# EAGLE board Schematic v37 (EAGLE 9.7.0)
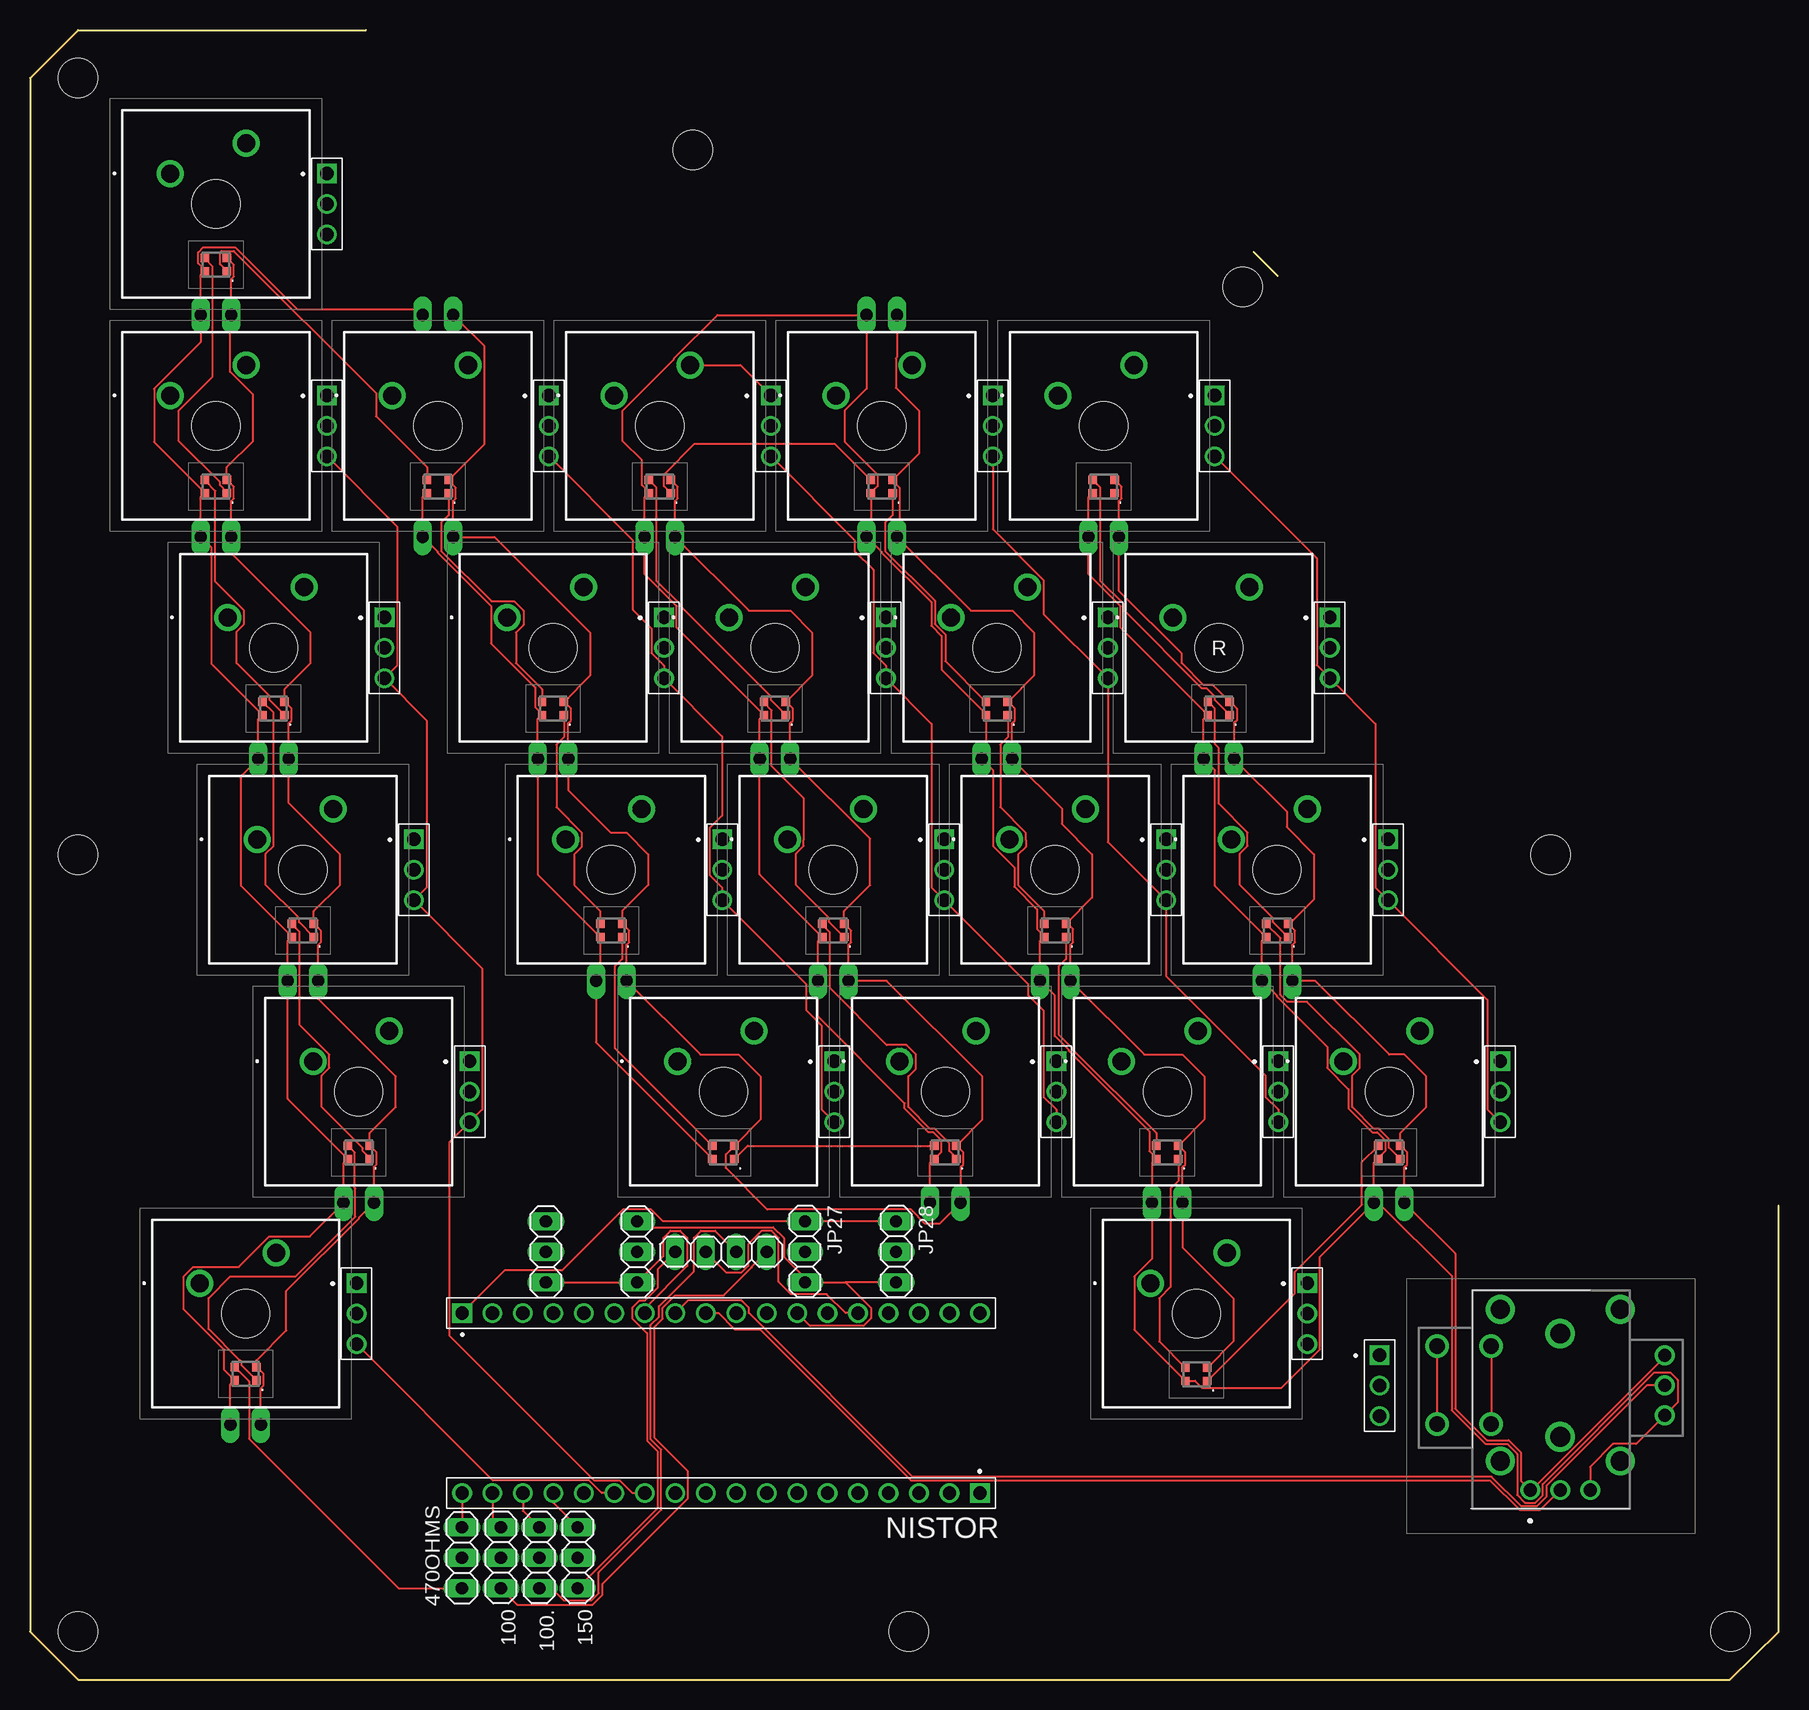
[diagram p0: board, top side]
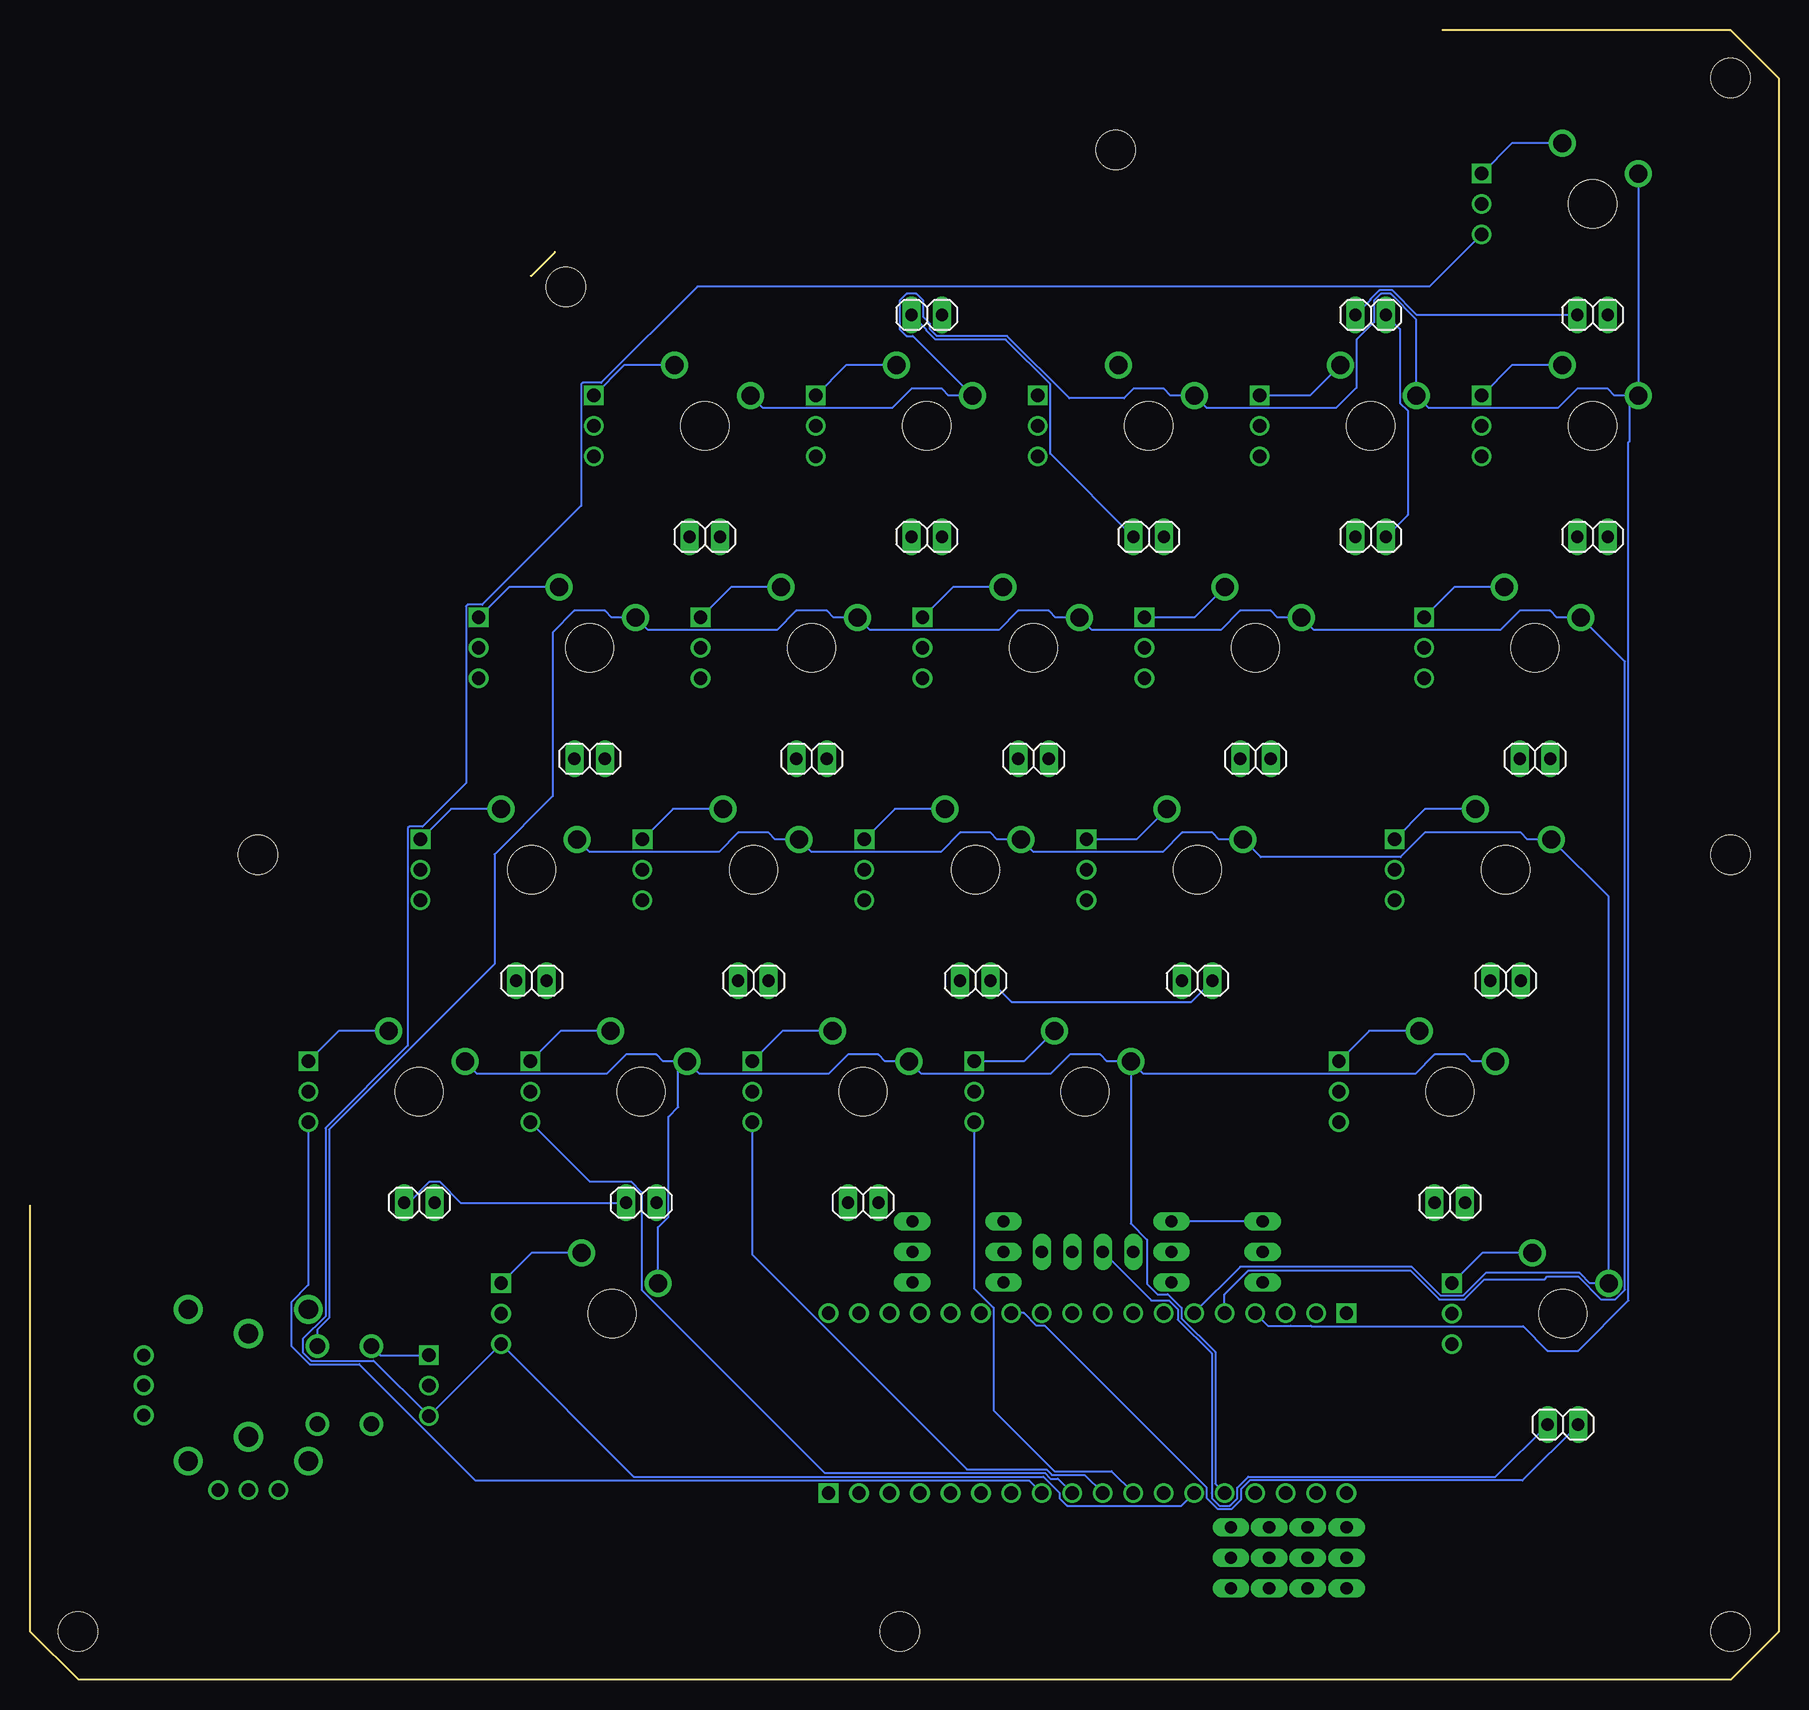
[diagram p1: board, bottom side, seen from below]

Size 145.75 x 137.5 mm. Coordinates in mm from the lower left corner, seen from the top.
Outline: 28,137.5 4,137.5 0,133.5 0,4 4,0 141.7,0 145.75,4 145.75,39.5
Outline: 104,117 102,119
Copper layers (1*16): Top / Bottom
Stack-up Default Layer Stack: Top User Defined 0.035mm / Dielectric-1 User Defined 1.5mm / Bottom User Defined 0.035mm
Design rules "default": minimum track width 6mil, minimum drill 0.35mm, track to track 6mil, track to pad 6mil, pad to pad 6mil, via to via 6mil, smd to smd 6mil, copper to edge 40mil, drill to drill 6mil, minimum pad ring 10mil, minimum via ring 8mil, stop-mask expansion 4mil, vias tented up to drill 0mil, thermal gap 10mil
Holes 3.25 mm at 4,133.5 4,4 141.75,4 101.08,116.08 73.25,4 4,68.75 126.75,68.75 55.25,127.5

## Footprints (pad centres in the part's own frame; a part is rotated, then mirrored left to right if it is on the bottom)
MX1AE1NW = drill 1.499 pad 2.248: 1 0,0; 2 6.35,2.54 | hole 3.988: 3.81,-2.54
1X03 = drill 1.016 long: 1 -2.54,0; 2 0,0; 3 2.54,0
RKJXV122400R = drill 1.3 pad 1.95: A1 -11.98,-3.25; B1 -11.98,-7.75; C1 -5.48,-3.25; D1 -5.48,-7.75 | drill 1.1 pad 1.65: A11 0,0; A12 0,2.5; A13 0,5; B11 -6.23,11.23; B12 -8.73,11.23; B13 -11.23,11.23 | drill 1.6 pad 2.4: MH1 -15.055,-2.5; MH2 -15.055,7.5; MH3 -2.405,-2.5; MH4 -2.405,7.5 | drill 1.65 pad 2.475: MH5 -13.03,2.5; MH6 -4.43,2.5
61300311121 = drill 1.1 square: 1 -2.54,0 | drill 1.1: 2 0,0; 3 2.54,0
61301811121 = drill 1.1 square: 1 -21.59,0 | drill 1.1: 2 -19.05,0; 3 -16.51,0; 4 -13.97,0; 5 -11.43,0; 6 -8.89,0; 7 -6.35,0; 8 -3.81,0; 9 -1.27,0; 10 1.27,0; 11 3.81,0; 12 6.35,0; 13 8.89,0; 14 11.43,0; 15 13.97,0; 16 16.51,0; 17 19.05,0; 18 21.59,0
1X04 = drill 1.016 long: 1 -3.81,0; 2 -1.27,0; 3 1.27,0; 4 3.81,0
1X02 = drill 1.016 long: 1 -1.27,0; 2 1.27,0
WS2812B2020 = smd 0.7 x 0.7: 1 0.915,-0.55; 2 0.915,0.55; 3 -0.915,0.55; 4 -0.915,-0.55

## Placement (x,y rotation side)
1  MX1A-E1NW  [MX1AE1NW]  30.19,107.04 0 top
2  MX1A-E1NW  [MX1AE1NW]  48.69,107.04 0 top
3  MX1A-E1NW  [MX1AE1NW]  67.19,107.04 0 top
4  MX1A-E1NW  [MX1AE1NW]  85.69,107.04 0 top
100  PINHD-1X3  [1X03]  39.25,10.15 270 top
100.  PINHD-1X3  [1X03]  42.45,10.15 270 top
150  PINHD-1X3  [1X03]  45.65,10.15 270 top
470OHMS  PINHD-1X3  [1X03]  36,10.15 90 top
A  MX1A-E1NW  [MX1AE1NW]  44.64,70.04 0 top
A_STICK  RKJXV122400R  [RKJXV122400R]  125.05,15.8 270 top
C  MX1A-E1NW  [MX1AE1NW]  90.99,51.54 0 top
CAPS  MX1A-E1NW  [MX1AE1NW]  18.94,70.04 0 top
CTRL  MX1A-E1NW  [MX1AE1NW]  14.16,33.04 0 top
D  MX1A-E1NW  [MX1AE1NW]  81.64,70.04 0 top
E  MX1A-E1NW  [MX1AE1NW]  76.79,88.54 0 top
ESC  MX1A-E1NW  [MX1AE1NW]  11.69,125.54 0 top
F  MX1A-E1NW  [MX1AE1NW]  100.14,70.04 0 top
J1  61300311121  [61300311121]  24.75,104.5 270 top
J2  61300311121  [61300311121]  24.75,123 270 top
J3  61300311121  [61300311121]  29.55,86 270 top
J4  61300311121  [61300311121]  32,67.5 270 top
J5  61300311121  [61300311121]  36.65,49 270 top
J6  61300311121  [61300311121]  27.23,30.5 270 top
J7  61300311121  [61300311121]  43.25,104.5 270 top
J8  61300311121  [61300311121]  52.85,86 270 top
J9  61300311121  [61300311121]  57.7,67.5 270 top
J10  61300311121  [61300311121]  67.05,49 270 top
J11  61300311121  [61300311121]  85.55,49 270 top
J12  61300311121  [61300311121]  76.2,67.5 270 top
J13  61300311121  [61300311121]  71.35,86 270 top
J14  61300311121  [61300311121]  61.75,104.5 270 top
J15  61300311121  [61300311121]  80.25,104.5 270 top
J16  61300311121  [61300311121]  89.85,86 270 top
J17  61300311121  [61300311121]  94.7,67.5 270 top
J18  61300311121  [61300311121]  104.05,49 270 top
J19  61300311121  [61300311121]  98.75,104.5 270 top
J20  61300311121  [61300311121]  108.35,86 270 top
J21  61300311121  [61300311121]  113.2,67.5 270 top
J22  61300311121  [61300311121]  122.55,49 270 top
J23  61300311121  [61300311121]  106.47,30.5 270 top
J24  61301811121  [61301811121]  57.6,30.55 0 top
J26  61300311121  [61300311121]  112.5,24.5 270 top
JP1  PINHD-1X3  [1X03]  50.6,35.65 90 top
JP2  PINHD-1X3  [1X03]  43,35.65 90 top
JP3  PINHD-1X4  [1X04]  57.6,35.65 0 top
JP4  PINHD-1X2  [1X02]  17.98,21.25 0 bottom
JP5  PINHD-1X2  [1X02]  27.4,39.75 0 bottom
JP6  PINHD-1X2  [1X02]  22.75,58.25 0 bottom
JP7  PINHD-1X2  [1X02]  20.3,76.75 0 bottom
JP8  PINHD-1X2  [1X02]  15.5,95.25 0 bottom
JP9  PINHD-1X2  [1X02]  15.5,113.75 0 bottom
JP10  PINHD-1X2  [1X02]  34,113.75 0 bottom
JP11  PINHD-1X2  [1X02]  34,95.25 0 bottom
JP12  PINHD-1X2  [1X02]  43.6,76.75 0 bottom
JP13  PINHD-1X2  [1X02]  48.45,58.25 0 bottom
JP14  PINHD-1X2  [1X02]  76.3,39.75 0 bottom
JP15  PINHD-1X2  [1X02]  66.95,58.25 0 bottom
JP16  PINHD-1X2  [1X02]  62.1,76.75 0 bottom
JP17  PINHD-1X2  [1X02]  52.5,95.25 0 bottom
JP18  PINHD-1X2  [1X02]  71,113.75 0 bottom
JP19  PINHD-1X2  [1X02]  71,95.25 0 bottom
JP20  PINHD-1X2  [1X02]  80.6,76.75 0 bottom
JP21  PINHD-1X2  [1X02]  85.45,58.25 0 bottom
JP22  PINHD-1X2  [1X02]  94.8,39.75 0 bottom
JP23  PINHD-1X2  [1X02]  113.3,39.75 0 bottom
JP24  PINHD-1X2  [1X02]  103.95,58.25 0 bottom
JP25  PINHD-1X2  [1X02]  99.1,76.75 0 bottom
JP26  PINHD-1X2  [1X02]  89.5,95.25 0 bottom
JP27  PINHD-1X3  [1X03]  64.6,35.65 270 top
JP28  PINHD-1X3  [1X03]  72.2,35.65 270 top
LED1  WS2812B-2020  [WS2812B2020]  17.98,25.49 0 top
LED2  WS2812B-2020  [WS2812B2020]  27.4,43.95 0 top
LED3  WS2812B-2020  [WS2812B2020]  22.75,62.45 0 top
LED4  WS2812B-2020  [WS2812B2020]  20.3,80.95 0 top
LED5  WS2812B-2020  [WS2812B2020]  15.5,99.45 0 top
LED6  WS2812B-2020  [WS2812B2020]  15.5,117.95 0 top
LED7  WS2812B-2020  [WS2812B2020]  34,99.45 0 top
LED8  WS2812B-2020  [WS2812B2020]  43.6,80.95 0 top
LED9  WS2812B-2020  [WS2812B2020]  48.45,62.45 0 top
LED10  WS2812B-2020  [WS2812B2020]  57.8,43.95 0 top
LED11  WS2812B-2020  [WS2812B2020]  76.3,43.95 0 top
LED12  WS2812B-2020  [WS2812B2020]  66.95,62.45 0 top
LED13  WS2812B-2020  [WS2812B2020]  62.1,80.95 0 top
LED14  WS2812B-2020  [WS2812B2020]  52.5,99.45 0 top
LED15  WS2812B-2020  [WS2812B2020]  71,99.45 0 top
LED16  WS2812B-2020  [WS2812B2020]  80.6,80.95 0 top
LED17  WS2812B-2020  [WS2812B2020]  85.45,62.45 0 top
LED18  WS2812B-2020  [WS2812B2020]  94.8,43.95 0 top
LED19  WS2812B-2020  [WS2812B2020]  97.22,25.45 0 top
LED20  WS2812B-2020  [WS2812B2020]  113.3,43.95 0 top
LED21  WS2812B-2020  [WS2812B2020]  103.95,62.45 0 top
LED22  WS2812B-2020  [WS2812B2020]  99.1,80.95 0 top
LED23  WS2812B-2020  [WS2812B2020]  89.5,99.45 0 top
NISTOR  61301811121  [61301811121]  57.6,15.55 180 top
Q  MX1A-E1NW  [MX1AE1NW]  39.79,88.54 0 top
R  MX1A-E1NW  [MX1AE1NW]  95.29,88.54 0 top
S  MX1A-E1NW  [MX1AE1NW]  63.14,70.04 0 top
SHIFT  MX1A-E1NW  [MX1AE1NW]  23.59,51.54 0 top
SPACE  MX1A-E1NW  [MX1AE1NW]  93.42,33.04 0 top
TAB  MX1A-E1NW  [MX1AE1NW]  16.49,88.54 0 top
V  MX1A-E1NW  [MX1AE1NW]  109.49,51.54 0 top
W  MX1A-E1NW  [MX1AE1NW]  58.29,88.54 0 top
X  MX1A-E1NW  [MX1AE1NW]  72.49,51.54 0 top
Z  MX1A-E1NW  [MX1AE1NW]  53.99,51.54 0 top
~  MX1A-E1NW  [MX1AE1NW]  11.69,107.04 0 top

## Library data of the parts
1-4 A C CAPS CTRL D E ESC F Q R S SHIFT SPACE TAB V W X Z ~ = SamacSys_Parts; DESCRIPTION: Pushbutton Switches Full Travel, Mech. Keyswitch, Click Tactile Feel (Blue stem), 60cN, No LED, No Diode, Fixation Pins for PCB Mounting; HEIGHT: 15.2mm; MANUFACTURER_NAME: Cherry; MANUFACTURER_PART_NUMBER: MX1A-E1NW; MOUSER_PART_NUMBER: 540-MX1A-E1NW; MOUSER_PRICE-STOCK: https://www.mouser.co.uk/ProductDetail/CHERRY/MX1A-E1NW/?qs=Z7NFYKyvgJd45Wm4xzFv7w%3D%3D
100 100. 150 470OHMS JP1-JP28 = Connector; CATEGORY: CONNECTOR; SUB-CATEGORY: PIN-HEADER
A_STICK = SamacSys_Parts; DESCRIPTION: RKJXV122400R; HEIGHT: 18.95mm; MANUFACTURER_NAME: ALPS; MANUFACTURER_PART_NUMBER: RKJXV122400R; MOUSER_PART_NUMBER: 688-RKJXV122400R; MOUSER_PRICE-STOCK: https://www.mouser.co.uk/ProductDetail/ALPS/RKJXV122400R?qs=GedFDFLaBXEbB%252ByoOVwLBg%3D%3D
J1-J23 J26 = Headers; CREATED_BY: PCBLayout.com; DIGI_KEY_PART_NUMBER: 732-5316-ND; MANUFACTURER: Wurth Electronics Inc.; MPN: 61300311121
J24 NISTOR = Headers; CREATED_BY: PCBLayout.com; DIGIKEY_PART_NUMBER: 732-5328-ND; MANUFACTURER: Wurth Electronics Inc.; MPN: 61301811121
LED1-LED23 = WS2812B-2020; DESCRIPTION: LED; SMD; 2020; RGB; 2x2x0.84mm; 3.75.3V; Lens: transparent; 2kHz; HEIGHT: 0.84mm; MANUFACTURER_NAME: Worldsemi; MANUFACTURER_PART_NUMBER: WS2812B-2020

## Nets
N$1: J1.1 ~.2
N$2: ESC.2 J2.1
N$3: J3.1 TAB.2
N$4: CAPS.2 J4.1
N$5: J5.1 SHIFT.2
N$6: CTRL.2 J6.1
N$7: J11.1 X.2
N$8: J12.1 S.2
N$9: J13.1 W.2
N$10: 2.2 J14.1
N$11: 3.2 J15.1
N$12: E.2 J16.1
N$13: D.2 J17.1
N$14: C.2 J18.1
N$15: 4.2 J19.1
N$16: J20.1 R.2
N$17: F.2 J21.1
N$18: J22.1 V.2
N$19: J23.1 SPACE.2
N$20: A_STICK.A11 A_STICK.B13 J24.14 JP3.2 JP4.1 JP5.1 JP6.1 JP7.1 JP8.1 JP9.1 JP10.1 JP11.1 JP12.1 JP13.1 JP14.1 JP15.1 JP16.1 JP17.1 JP18.1 JP19.1 JP20.1 JP21.1 JP22.1 JP23.1 JP24.1 JP25.1 JP26.1 LED1.2 LED2.2 LED3.2 LED4.2 LED5.2 LED6.2 LED7.2 LED8.2 LED9.2 LED10.2 LED11.2 LED12.2 LED13.2 LED14.2 LED15.2 LED16.2 LED17.2 LED18.2 LED19.2 LED20.2 LED21.2 LED22.2 LED23.2
N$21: A.1 CAPS.1 CTRL.1 D.1 F.1 J24.6 S.1
N$22: A_STICK.A1 A_STICK.C1 E.1 J24.5 Q.1 R.1 TAB.1 W.1
N$23: 1.1 2.1 3.1 4.1 ESC.1 J24.4 ~.1
N$24: J1.3 J3.3 J4.3 J5.3 NISTOR.12
N$25: 1.2 J7.1
N$26: J8.1 Q.2
N$27: A.2 J9.1
N$28: J10.1 Z.2
N$29: J7.3 J8.3 J9.3 J10.3 NISTOR.11
N$30: J11.3 J12.3 J13.3 J14.3 NISTOR.10
N$31: J15.3 J16.3 J17.3 J18.3 NISTOR.9
N$32: J19.3 J20.3 J21.3 J22.3 NISTOR.8
N$33: J2.3 J6.3 J23.3 J26.3 NISTOR.13
N$34: 100.1 NISTOR.17
N$35: 100..1 NISTOR.16
N$36: 150.1 NISTOR.15
N$37: J24.1 JP27.1 JP28.1
N$38: 150.3 JP3.1
N$39: J24.7 JP1.1 JP2.1
N$41: A_STICK.A13 A_STICK.B11 J24.12 JP1.3 JP2.3 JP4.2 JP5.2 JP6.2 JP7.2 JP8.2 JP9.2 JP10.2 JP11.2 JP12.2 JP13.2 JP14.2 JP15.2 JP16.2 JP17.2 JP18.2 JP19.2 JP20.2 JP21.2 JP22.2 JP23.2 JP24.2 JP25.2 JP26.2 JP27.3 JP28.3 LED1.4 LED2.4 LED3.4 LED4.4 LED5.4 LED6.4 LED7.4 LED8.4 LED9.4 LED10.4 LED11.4 LED12.4 LED13.4 LED14.4 LED15.4 LED16.4 LED17.4 LED18.4 LED19.4 LED20.4 LED21.4 LED22.4 LED23.4
N$42: A_STICK.B12 J24.8
N$43: A_STICK.A12 J24.9
N$44: C.1 NISTOR.14 SHIFT.1 SPACE.1 V.1 X.1 Z.1
N$45: A_STICK.B1 A_STICK.D1 J26.1
N$46: 100..3 JP3.3
N$47: LED1.1 LED2.3
N$48: LED2.1 LED3.3
N$49: LED3.1 LED4.3
N$50: LED4.1 LED5.3
N$51: LED5.1 LED6.3
N$52: LED6.1 LED7.3
N$53: LED7.1 LED8.3
N$54: LED8.1 LED9.3
N$55: LED9.1 LED10.3
N$56: LED10.1 LED11.3
N$57: LED11.1 LED12.3
N$58: LED12.1 LED13.3
N$59: LED13.1 LED14.3
N$60: LED14.1 LED15.3
N$61: LED15.1 LED16.3
N$62: LED16.1 LED17.3
N$63: LED17.1 LED18.3
N$64: LED18.1 LED19.3
N$65: LED19.1 LED20.3
N$66: LED20.1 LED21.3
N$67: LED21.1 LED22.3
N$68: LED22.1 LED23.3
N$69: 470OHMS.3 NISTOR.18
N$70: 100.3 JP3.4
N$71: 470OHMS.1 LED1.3

## Tracks (layer width: path | path; a pad name or v marks a point on that pad's centre or on a via)
N$1
  Bottom 0.152: ~.2 22.21,109.58 J1.1
N$2
  Bottom 0.152: ESC.2 22.21,128.08 J2.1
N$3
  Bottom 0.152: TAB.2 27.01,91.08 J3.1
N$4
  Bottom 0.152: CAPS.2 29.46,72.58 J4.1
N$5
  Bottom 0.152: SHIFT.2 34.11,54.08 J5.1
N$6
  Bottom 0.152: CTRL.2 24.68,35.58 J6.1
N$7
  Bottom 0.152: X.2 83.01,54.08 J11.1
N$8
  Bottom 0.152: S.2 73.66,72.58 J12.1
N$9
  Bottom 0.152: W.2 68.81,91.08 J13.1
N$10
  Top 0.152: 2.2 59.21,109.58 J14.1
N$11
  Bottom 0.152: 3.2 77.71,109.58 J15.1
N$12
  Bottom 0.152: E.2 87.31,91.08 J16.1
N$13
  Bottom 0.152: D.2 92.16,72.58 J17.1
N$14
  Bottom 0.152: C.2 101.51,54.08 J18.1
N$15
  Bottom 0.152: 4.2 96.21,109.58 J19.1
N$16
  Bottom 0.152: R.2 105.81,91.08 J20.1
N$17
  Bottom 0.152: F.2 110.66,72.58 J21.1
N$18
  Bottom 0.152: V.2 120.01,54.08 J22.1
N$19
  Bottom 0.152: SPACE.2 103.94,35.58 J23.1
N$20
  Top 0.152: A_STICK.B13 136.28,26.89 125.16,15.76 125.09,15.76 A_STICK.A11 124.28,16.57 124.28,18.92 123.27,19.94 121.44,19.94 118.81,22.57 118.81,35.51 JP23.1 114.57,42.73 114.79,42.95 114.79,43.92 LED20.2 114.22,45.55 116.39,47.72 116.39,50.28 114.58,52.09 113.3,52.09 107.14,58.25 JP24.1 105.22,61.23 105.44,61.45 105.44,62.42 104.93,62.93 | JP4.1 19.25,24.28 19.47,24.5 19.47,25.47 LED1.2 18.89,26.62 21.37,29.09 21.37,32.39 27.43,38.45 27.43,38.51 JP5.1 28.67,42.73 28.89,42.95 28.89,43.92 LED2.2 28.32,45.55 30.49,47.72 30.49,50.28 24.02,56.74 JP6.1 24.02,61.22 24.26,61.47 24.26,62.4 LED3.2 23.66,64.05 25.84,66.22 25.84,68.78 21.57,73.04 JP7.1 21.57,79.73 21.79,79.95 21.79,80.92 LED4.2 21.21,82.55 23.39,84.72 23.39,87.28 16.77,93.89 JP8.1 16.77,98.23 16.99,98.45 16.99,99.42 LED5.2 16.41,101.05 18.59,103.22 18.59,107.12 16.69,109.02 16.69,113.67 JP9.1 16.77,116.73 16.99,116.95 16.99,117.92 LED6.2 | JP10.1 37.89,111.13 37.89,102.98 LED7.2 34.91,99.92 35.49,99.34 35.49,98.45 35.27,98.23 JP11.1 38.71,95.25 46.69,87.28 46.69,83.67 LED8.2 45.09,80.92 45.09,79.95 44.87,79.73 JP12.1 44.87,74.13 48.41,70.59 49.73,70.59 51.54,68.78 51.54,66.22 49.37,64.05 LED9.2 49.94,62.42 49.94,61.45 49.72,61.23 JP13.1 55.88,52.09 59.08,52.09 60.89,50.28 60.89,46.67 LED10.2 58,43.78 58,42.63 61.45,39.18 73.44,39.18 74.62,38 75.82,38 JP14.1 77.57,42.73 77.79,42.95 77.79,43.92 LED11.2 79.39,46.67 79.39,50.28 71.41,58.25 JP15.1 68.22,61.23 68.44,61.45 68.44,62.42 LED12.2 67.86,64.05 70.04,66.22 70.04,70.08 JP16.1 63.37,79.73 63.59,79.95 63.59,80.92 LED13.2 65.19,83.67 65.19,87.28 63.38,89.09 59.93,89.09 JP17.1 53.77,98.23 53.99,98.45 53.99,99.42 LED14.2
  Top 0.152: JP18.1 72.27,110.22 72.19,110.14 72.19,107.68 74.09,105.78 74.09,102.17 LED15.2 71.92,99.92 72.49,99.34 72.49,95.47 JP19.1 78.43,89.09 81.88,89.09 83.69,87.28 83.69,83.67 LED16.2 82.09,80.92 82.09,79.95 81.87,79.73 JP20.1 86,72.62 86,71.31 88.54,68.78 88.54,65.17 86.43,63.07 | 86.43,63.07 LED17.2 | 86.43,63.07 86.94,62.56 86.94,61.45 86.72,61.23 JP21.1 92.88,52.09 96.08,52.09 97.89,50.28 97.89,46.67 LED18.2 96.29,43.92 96.29,42.95 96.07,42.73 JP22.1 96.07,36.02 100.31,31.78 100.31,28.17 LED19.2 | 104.93,62.93 LED21.2 | 104.93,62.93 107.04,65.04 107.04,68.78 104.75,71.06 104.75,72.37 JP25.1 100.37,79.73 100.59,79.95 100.59,80.92 LED22.2 98.6,82.91 97.82,82.91 96.01,84.72 96.01,85.5 90.77,90.75 JP26.1 90.77,98.23 90.99,98.45 90.99,99.42 LED23.2 | J24.14 67.98,30.55 66.41,32.12 63.43,32.12 62.4,33.15 62.4,36.82 61.82,37.4 61,37.4 59.86,36.26 59.86,34.48 59.28,33.9 58.08,33.9 JP3.2
  Bottom 0.152: JP17.1 60.7,102.18 60.7,107.96 64.43,111.69 70.27,111.69 71.03,112.45 71.03,112.5 JP18.1 | JP23.1 114.19,39.75 112.44,41.5 111.62,41.5 109.87,39.75 JP22.1 | JP9.1 30.14,113.75 32.19,115.81 33.27,115.81 34.02,115.05 34.02,115 JP10.1 | JP4.1 23.59,16.91 44.19,16.91 45.12,15.98 45.12,15.11 45.73,14.5 46.61,14.5 47.22,15.11 47.22,15.52 47.25,15.55 47.25,27.17 50.07,29.99 50.07,30.86 50.81,31.6 52.28,31.6 JP3.2
N$21
  Bottom 0.152: F.1 99.09,68.99 88.33,68.99 86.73,70.59 84.17,70.59 83.63,70.04 D.1 80.59,68.99 69.83,68.99 68.23,70.59 65.67,70.59 65.13,70.04 S.1 62.09,68.99 51.33,68.99 49.73,70.59 47.17,70.59 46.63,70.04 A.1 43.15,68.55 31.51,68.55 29.48,70.59 21.47,70.59 20.93,70.04 CAPS.1 14.16,65.27 CTRL.1 15.72,33.04 16.57,33.89 24.4,33.89 26.3,31.99 28.14,31.99 30.56,34.41 44.85,34.41 J24.6
N$22
  Top 0.152: A_STICK.A1 A_STICK.C1
  Bottom 0.152: A_STICK.A1 121.8,29.15 120.82,30.14 120.82,45.85 107.04,59.63 107.04,68.78 102.19,73.63 102.19,87.28 100.38,89.09 97.82,89.09 97.28,88.54 R.1 94.23,87.48 83.48,87.48 81.88,89.09 79.32,89.09 78.78,88.54 E.1 75.74,87.49 64.98,87.49 63.38,89.09 60.82,89.09 60.28,88.54 W.1 57.24,87.49 46.48,87.49 44.88,89.09 42.32,89.09 41.78,88.54 Q.1 38.74,87.49 23.18,87.49 21.58,89.09 19.02,89.09 18.48,88.54 TAB.1 12.81,84.86 12.81,32.48 13.61,31.69 14.8,31.69 16.7,33.59 19.25,33.59 19.49,33.35 24.51,33.35 26.18,31.68 28.27,31.68 30.69,34.1 44.17,34.1 46.17,32.1 J24.5
N$23
  Bottom 0.152: ESC.1 ~.1 | ~.1 13.68,107.04 14.22,107.59 16.78,107.59 18.38,105.99 29.14,105.99 1.1 30.19,113.37 32.32,115.5 33.14,115.5 33.72,114.92 33.72,113.14 35.19,111.67 35.19,107.68 36.88,105.99 47.64,105.99 2.1 50.68,107.04 51.22,107.59 53.78,107.59 54.56,106.81 59.11,106.81 64.3,112 70.14,112 70.72,112.58 70.72,113.01 71.28,113.57 71.28,114.92 71.86,115.5 72.68,115.5 73.26,114.92 73.26,112.58 72.68,112 72.15,112 3.1 69.18,107.04 69.72,107.59 72.28,107.59 73.88,105.99 84.64,105.99 4.1 | J24.4 42.58,29.5 40.65,29.5 38.99,29.5 38.94,29.45 21.29,29.45 19.25,27.41 16.7,27.41 12.51,31.6 12.51,103.13 12.41,103.22 12.41,106.32 ~.1
N$24
  Top 0.152: J1.3 30.6,96.11 30.6,84.51 J3.3 33.05,79.96 33.05,66.01 J4.3 37.7,59.26 37.7,47.51 J5.3 34.96,44.77 34.96,28.69 47.04,16.6 49.15,16.6 50.2,15.55 NISTOR.12
N$25
  Bottom 0.152: 1.2 39.08,107.04 J7.1
N$26
  Bottom 0.152: Q.2 48.68,88.54 J8.1
N$27
  Bottom 0.152: A.2 53.53,70.04 J9.1
N$28
  Bottom 0.152: Z.2 62.88,51.54 J10.1
N$29
  Top 0.152: J7.3 50.24,94.97 50.24,89.18 51.8,87.62 51.8,85.56 52.85,84.51 J8.3 57.7,78.61 57.7,72.01 56.65,70.96 56.65,67.06 57.7,66.01 J9.3 64.69,57.97 64.69,55.81 66,54.51 66,47.51 J10.3
  Bottom 0.152: NISTOR.11 55.6,17.36 60.36,17.36 65.44,22.43 65.44,30.99 67.05,32.6 J10.3
N$30
  Top 0.152: J14.3 68.74,94.97 68.74,94.08 70.3,92.52 70.3,85.56 71.35,84.51 J13.3 75.15,79.66 75.15,66.01 J12.3 83.19,57.97 83.19,57.08 84.5,55.77 84.5,48.56 85.55,47.51 J11.3
  Bottom 0.152: J11.3 85.55,35.42 67.65,17.52 61.03,17.52 60.56,17.05 57.84,17.05 NISTOR.10
N$31
  Top 0.152: J15.3 80.25,95.88 84.49,91.64 84.49,88.82 J16.3 89.85,69.81 J17.3 94.7,58.63 103,50.34 103,48.56 104.05,47.51 J18.3
  Bottom 0.152: J18.3 99.09,41.5 95.66,41.5 94.77,40.61 94.77,32.48 79.5,17.21 61.15,17.21 60.69,16.75 60.07,16.75 NISTOR.9
N$32
  Top 0.152: J19.3 107.25,93.46 107.25,84.56 J20.3 112.15,79.66 112.15,66.01 J21.3 121.5,56.66 121.5,47.51 J22.3
  Bottom 0.152: NISTOR.8 62.46,16.6 108.63,16.6 118.3,26.27 122.42,26.27 123.98,27.82 123.98,31.45 122.55,32.88 J22.3
N$33
  Top 0.152: J6.3 38.58,16.6 46.61,16.6 47.66,15.55 NISTOR.13
  Bottom 0.152: NISTOR.13 49.76,14.5 59.31,14.5 59.92,15.11 59.92,15.55 61.28,16.91 95.42,16.91 J23.3 112.47,21.96 J26.3 117.12,26.58 122.3,26.58 123,27.28 123,28.38 121.12,30.26 121.12,45.97 114.25,52.84 114.25,70.96 114.12,71.09 113.03,71.09 109.4,74.72 109.4,89.46 109.27,89.59 108.05,89.59 99.8,97.84 99.8,107.96 99.67,108.09 98.13,108.09 90.11,116.11 29.1,116.11 J2.3
N$34
  Top 0.152: NISTOR.17 38.55,13.39 100.1
N$35
  Top 0.152: NISTOR.16 41.09,14.05 100..1
N$36
  Top 0.152: NISTOR.15 43.63,14.71 150.1
N$37
  Top 0.152: JP28.1 JP27.1 52.76,38.19 51.77,39.18 49.43,39.18 44.35,34.1 39.56,34.1 J24.1
N$38
  Top 0.152: 150.3 52.3,14.26 52.3,19.03 51.44,19.9 51.44,28.87 50.2,30.11 50.2,30.99 50.81,31.6 51.26,31.6 52.35,32.7 52.35,34.21 JP3.1
N$39
  Top 0.152: JP2.1 JP1.1 52.8,35.31 52.8,36.82 53.38,37.4 54.2,37.4 54.78,36.82 54.78,34.48 51.25,30.95 J24.7
N$41
  Top 0.152: JP4.2 16.7,24.59 LED1.4 16.2,25.81 16.2,27.48 12.81,30.87 12.81,33.6 13.61,34.39 17.41,34.39 19.95,36.93 23.31,36.93 JP5.2 26.13,43.05 LED2.4 21.48,48.41 JP6.2 21.48,61.55 LED3.4 17.59,66.15 17.59,75.31 JP7.2 19.03,80.05 LED4.4 15.14,84.65 15.14,94.34 JP8.2 14.23,98.55 LED5.4 10.34,103.15 10.34,107.6 14.23,111.49 JP9.2 14.23,117.05 LED6.4 14.59,117.48 14.01,118.06 14.01,118.94 14.45,119.38 17.12,119.38 22.25,114.25 32.23,114.25 JP10.2 | LED7.4 32.73,98.55 JP11.2 33.98,94 33.98,93.95 38.44,89.49 38.44,86.37 42.11,82.7 42.11,81.06 42.69,80.48 LED8.4 42.33,80.05 JP12.2 42.33,67.11 LED9.4 47.53,58.61 JP13.2 47.18,53.11 LED10.4 | JP14.2 75.03,43.05 LED11.4 75.96,43.98 75.96,44.95 75.3,45.61 74.89,45.61 72.91,47.59 72.91,48.03 65.68,55.26 JP15.2 65.68,61.55 LED12.4 60.83,67.11 JP16.2 60.83,80.05 LED13.4 53.9,87.68 53.9,89.46 51.23,92.13 JP17.2 51.23,98.55 LED14.4 51.59,98.98 51.01,99.56 51.01,101.63 49.41,103.22 49.41,105.78 53.69,110.05 53.69,110.14 57.3,113.75 JP18.2 69.73,107.59 67.91,105.78 67.91,103.19 70.66,100.44 70.66,99.48 LED15.4 70.08,95.6 JP19.2 70.97,94 70.97,93.95 75.13,89.79 75.13,87.85 75.99,86.99 75.99,84.17 79.69,80.48 LED16.4 79.69,77.1 JP20.2 80.29,75.79 80.29,69.48 82.06,67.71 82.06,66.09 83.96,64.2 83.96,62.55 84.53,61.98 LED17.4 84.18,61.55 JP21.2 85.42,57 85.42,53.64 86.6,52.46 86.6,52.4 93.31,45.7 93.31,44.05 93.89,43.48 LED18.4 93.53,43.05 JP22.2 93.53,35.07 92.06,33.6 92.06,29.15 LED19.4 97.12,24.9 97.69,24.32 104.33,24.32 107.53,27.52 107.53,35.25 JP23.2 | JP23.2 112.03,43.05 LED20.4 112.39,43.48 112.96,44.05 112.96,44.95 112.3,45.61 111.89,45.61 109.91,47.59 109.91,49.21 108.14,50.98 108.14,52.74 103.92,56.95 103.92,57 JP24.2 102.68,61.55 LED21.4 98.79,66.15 98.79,75.79 JP25.2 97.83,80.05 LED22.4 90.9,87.68 90.9,89.46 88.23,92.13 JP26.2 88.23,98.55 LED23.4
  Top 0.152: JP23.2 112.41,39.75 118.5,33.65 118.5,22.44 121.31,19.63 123.14,19.63 123.98,18.8 123.98,15.38 124.61,14.75 125.49,14.75 126.1,15.36 126.1,16.28 135.41,25.58 136.72,25.58 137.33,24.97 137.33,23.08 A_STICK.B11 133.88,19.63 131.96,19.63 130.05,17.73 A_STICK.A13 | J24.12 65,29.5 69.47,29.5 70.08,30.11 70.08,30.99 67.96,33.11 | 67.96,33.11 JP27.3 64.6,33.49 62.85,35.24 62.85,36.81 61.95,37.71 51.08,37.71 JP1.3 | JP28.3 67.96,33.11
  Bottom 0.152: JP10.2 31.54,112.56 31.54,106.41 30.91,105.78 30.91,97.07 JP11.2 | JP15.2 63.93,56.5 48.93,56.5 JP13.2 | JP4.2 21.35,16.6 44.07,16.6 44.81,15.86 44.81,14.99 45.61,14.19 46.73,14.19 47.66,15.11 47.66,15.99 61.17,29.5 61.85,29.5 62.9,30.55 J24.12 | JP2.3 JP1.3
N$42
  Top 0.152: A_STICK.B12 134.78,24.53 126.41,16.15 126.41,15.24 125.61,14.44 124.29,14.44 121.83,16.91 73.56,16.91 59.92,30.55 59.92,30.99 59.31,31.6 54.84,31.6 J24.8
N$43
  Top 0.152: J24.9 57.38,30.55 58.74,29.19 60.85,29.19 73.44,16.6 121.7,16.6 124.17,14.14 125.89,14.14 A_STICK.A12
N$44
  Bottom 0.152: SHIFT.1 25.58,51.54 26.12,52.09 28.68,52.09 30.28,50.49 52.94,50.49 Z.1 | Z.1 55.98,51.54 56.52,52.09 59.08,52.09 60.68,50.49 71.44,50.49 X.1 74.48,51.54 75.02,52.09 77.58,52.09 79.18,50.49 89.94,50.49 90.97,51.52 | 90.97,51.52 C.1 92.98,51.54 93.52,52.09 96.08,52.09 97.68,50.49 108.49,50.49 109.49,51.49 V.1 | SPACE.1 93.42,37.7 92.54,38.58 92.54,46.9 91.71,47.72 91.71,50.79 90.97,51.52 | NISTOR.14 46.95,16.32 46.95,27.3 49.76,30.11 49.76,30.98 50.9,32.12 51.77,32.12 52.63,32.98 52.63,36.65 53.99,38.01 Z.1
N$45
  Top 0.152: A_STICK.D1 A_STICK.B1
  Bottom 0.152: A_STICK.B1 116.56,27.04 J26.1
N$46
  Top 0.152: 100..3 43.49,7.61 44.48,6.62 46.82,6.62 47.4,7.2 47.4,8.93 52.61,14.14 52.61,19.16 51.74,20.02 51.74,29.55 52.43,30.24 52.43,31.11 55.34,34.02 55.34,36.82 55.92,37.4 57.12,37.4 JP3.3
N$47
  Top 0.152: LED2.3 27.06,43.92 27.06,40.98 27.12,40.92 27.12,38.58 22.13,33.59 16.7,33.59 14.89,31.78 14.89,29.22 17.49,26.62 17.5,26.62 17.64,26.49 17.64,26.2 LED1.1
N$48
  Top 0.152: LED2.1 28.32,43.48 27.74,44.05 27.74,44.3 24.31,47.72 24.31,50.35 24.94,50.98 24.94,52.1 22.47,54.57 22.47,62.32 21.84,62.95 LED3.3
N$49
  Top 0.152: LED3.1 22.43,63.13 22.43,63.45 22.3,63.59 19.66,66.22 19.66,68.85 20.29,69.48 20.29,80.59 LED4.3
N$50
  Top 0.152: LED4.1 19.96,81.65 19.96,81.97 17.21,84.72 17.21,87.35 17.84,87.98 17.84,89.1 15.44,91.5 15.44,99.07 14.59,99.92 LED5.3
N$51
  Top 0.152: LED5.1 16.41,98.98 15.84,99.56 15.84,99.8 12.41,103.22 12.41,105.78 15.22,108.58 15.22,117.79 14.59,118.42 LED6.3
N$52
  Top 0.152: LED6.1 15.84,117.98 15.84,118.94 15.97,119.08 16.99,119.08 28.84,107.23 28.84,105.3 33.09,101.05 LED7.3
N$53
  Top 0.152: LED7.1 34.91,97.06 34.28,96.42 34.28,94.08 38.46,89.89 40.35,89.89 41.14,89.1 41.14,87.91 40.51,87.28 40.51,84.72 42.69,82.55 LED8.3
N$54
  Top 0.152: LED8.1 44.52,78.56 43.88,77.92 43.88,72.71 45.99,70.6 45.99,69.41 45.36,68.78 45.36,66.22 47.53,64.05 LED9.3
N$55
  Top 0.152: LED9.1 49.37,60.06 48.73,59.42 48.73,52.66 LED10.3
N$56
  Top 0.152: LED10.1 59.81,44.5 LED11.3
N$57
  Top 0.152: LED11.1 77.22,43.48 76.64,44.05 76.64,44.7 75.42,45.91 75.02,45.91 73.21,47.72 73.21,50.28 73.84,50.91 73.84,52.1 73.05,52.89 71.41,52.89 66.67,57.64 66.67,62.29 66.03,62.92 LED12.3
N$58
  Top 0.152: LED12.1 66.61,63.15 66.61,63.47 63.86,66.22 63.86,68.85 64.49,69.48 64.49,69.99 64.5,70 64.5,73.46 61.82,76.14 61.82,80.79 61.19,81.42 LED13.3
N$59
  Top 0.152: LED13.1 61.76,81.65 61.76,81.94 54.21,89.5 54.21,89.59 52.22,91.57 52.22,99.36 LED14.3
N$60
  Top 0.152: LED14.1 52.84,99.48 52.84,100.44 55.41,103.01 67.07,103.01 LED15.3
N$61
  Top 0.152: LED15.1 71.92,97.06 71.28,96.42 71.28,94.08 75.44,89.92 75.44,87.98 76.3,87.12 76.3,84.89 LED16.3
N$62
  Top 0.152: LED16.1 81.52,78.56 80.88,77.92 80.88,72.71 82.99,70.6 82.99,70.01 83,70 83,69.41 82.36,68.78 82.36,66.22 84.53,64.05 LED17.3
N$63
  Top 0.152: LED17.1 86.36,60.06 85.73,59.42 85.73,53.77 86.91,52.59 86.91,52.53 93.89,45.55 LED18.3
N$64
  Top 0.152: LED18.1 95.72,41.56 95.08,40.92 95.08,32.72 94.14,31.78 94.14,28.17 LED19.3
N$65
  Top 0.152: LED19.1 105.42,32.18 105.42,33.96 111.04,39.58 111.04,43.15 LED20.3
N$66
  Top 0.152: LED21.3 104.23,61.81 104.23,57.08 104.81,56.5 106.44,56.5 110.84,52.1 110.84,50.98 110.21,50.35 110.21,47.72 112.02,45.91 112.42,45.91 113.27,45.07 113.27,44.35 LED20.1
N$67
  Top 0.152: LED21.1 103.61,63.15 103.61,63.47 100.86,66.22 100.86,68.85 101.49,69.48 101.49,70.6 99.09,73 99.09,77.65 98.76,77.98 98.76,80.92 LED22.3
N$68
  Top 0.152: LED22.1 98.76,81.65 98.76,81.94 98.1,82.61 97.69,82.61 91.21,89.1 91.21,89.59 89.22,91.57 89.22,99.36 LED23.3
N$69
  Top 0.152: NISTOR.18 470OHMS.3
N$70
  Top 0.152: 100.3 40.61,6.25 46.88,6.25 47.71,7.07 47.71,7.98 54.84,15.11 54.84,17.35 52.05,20.15 52.05,29.38 52.74,30.07 52.74,30.99 53.75,32 57.82,32 60.16,34.35 60.16,34.41 JP3.4
N$71
  Top 0.152: LED1.3 18.25,24.85 18.25,20.08 30.72,7.61 470OHMS.1